# Altium PCB TL200 触摸板.PcbDoc
Units mm, origin at the board's own origin, x right, y up, seen from the top; angles counter-clockwise.
Board outline 50.45 x 47 mm, 2 copper layers (Top Layer, Bottom Layer); 13 components, 12 nets, 36 pads, 12 vias.
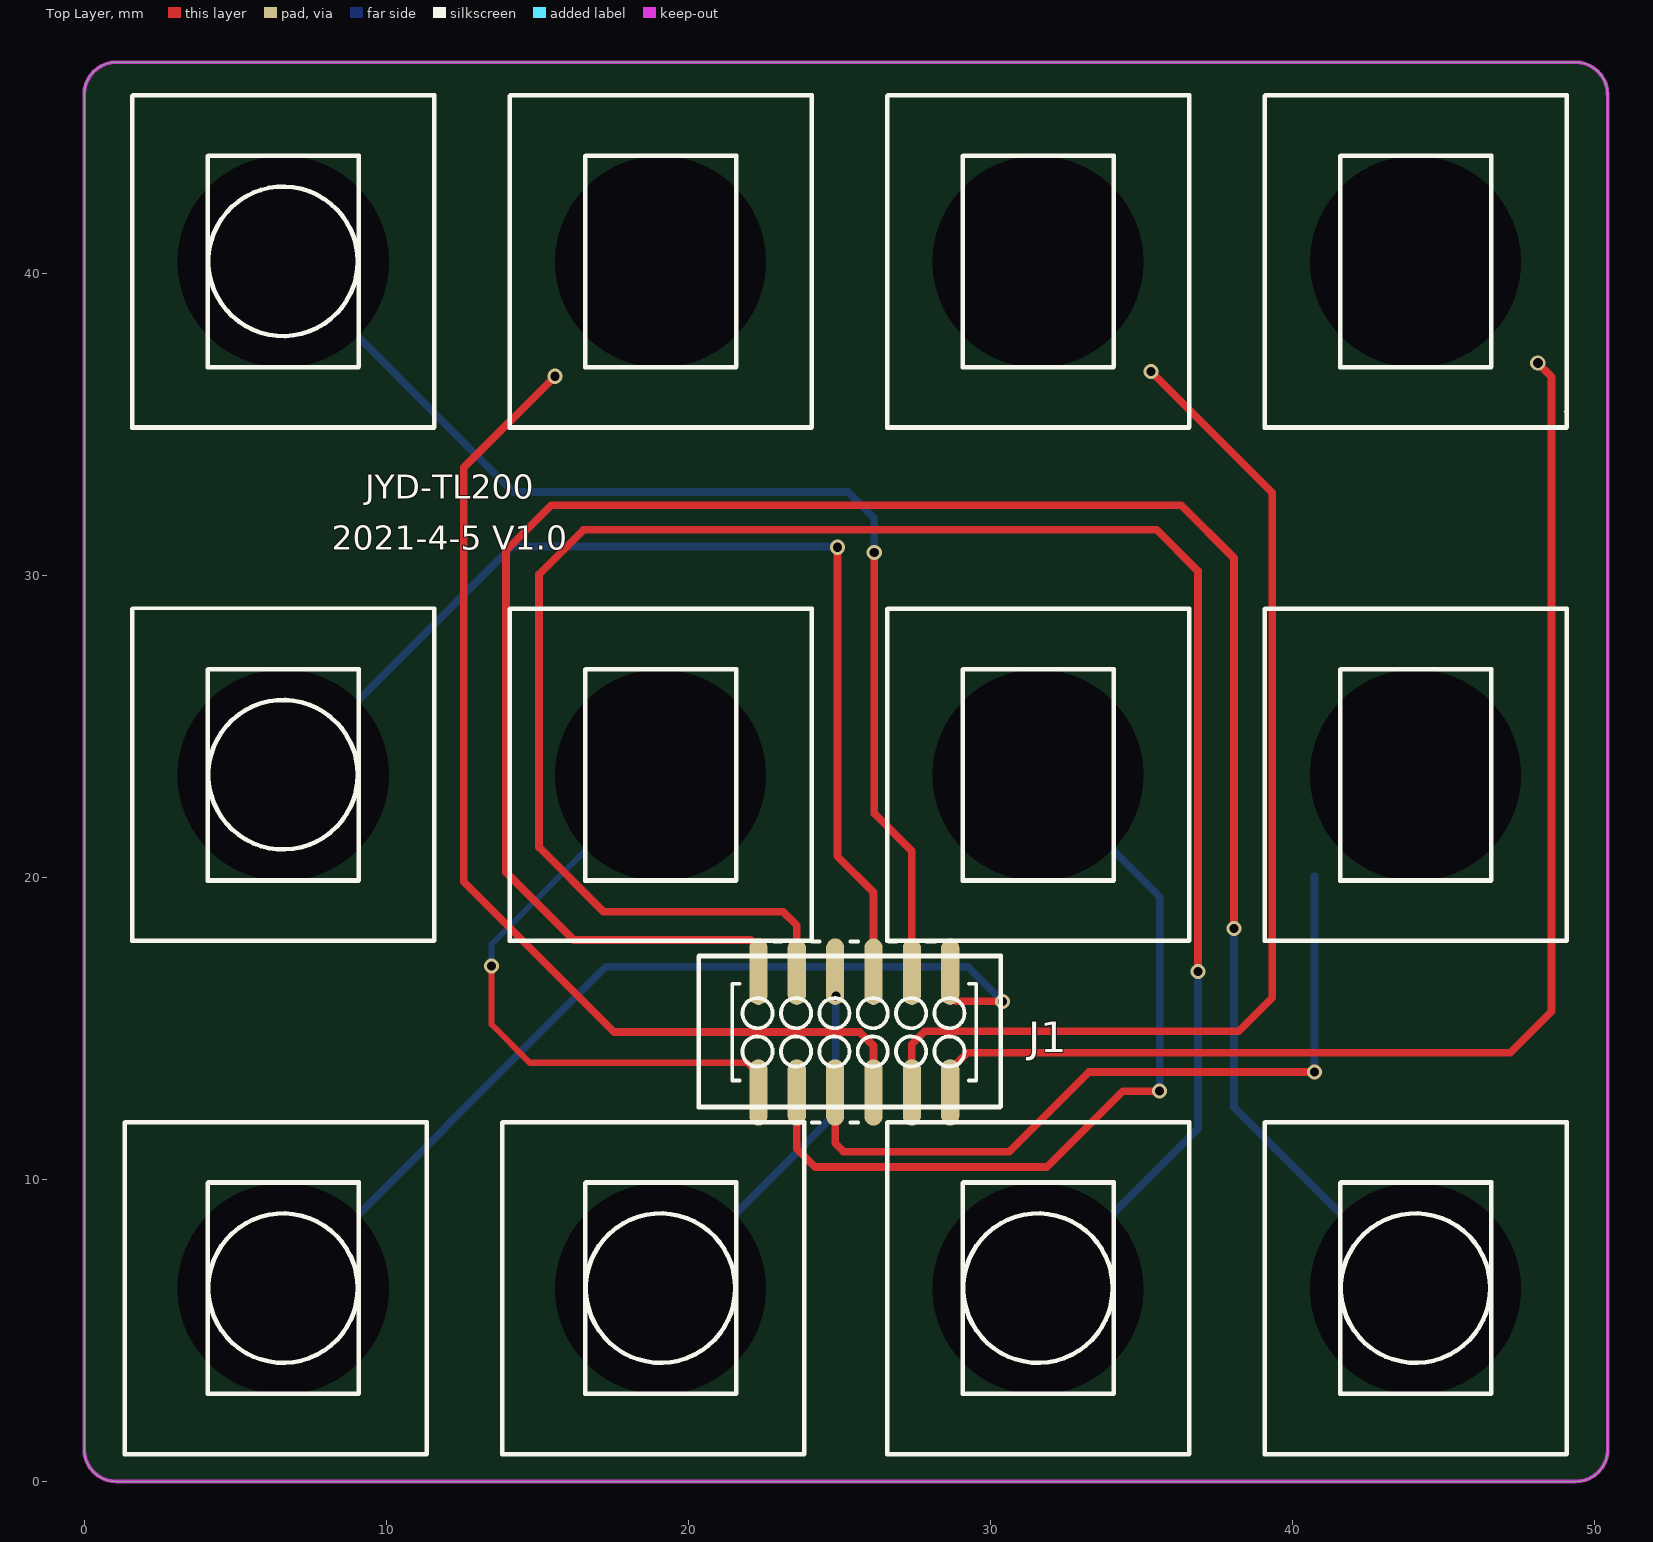
[diagram p0: Top Layer view]
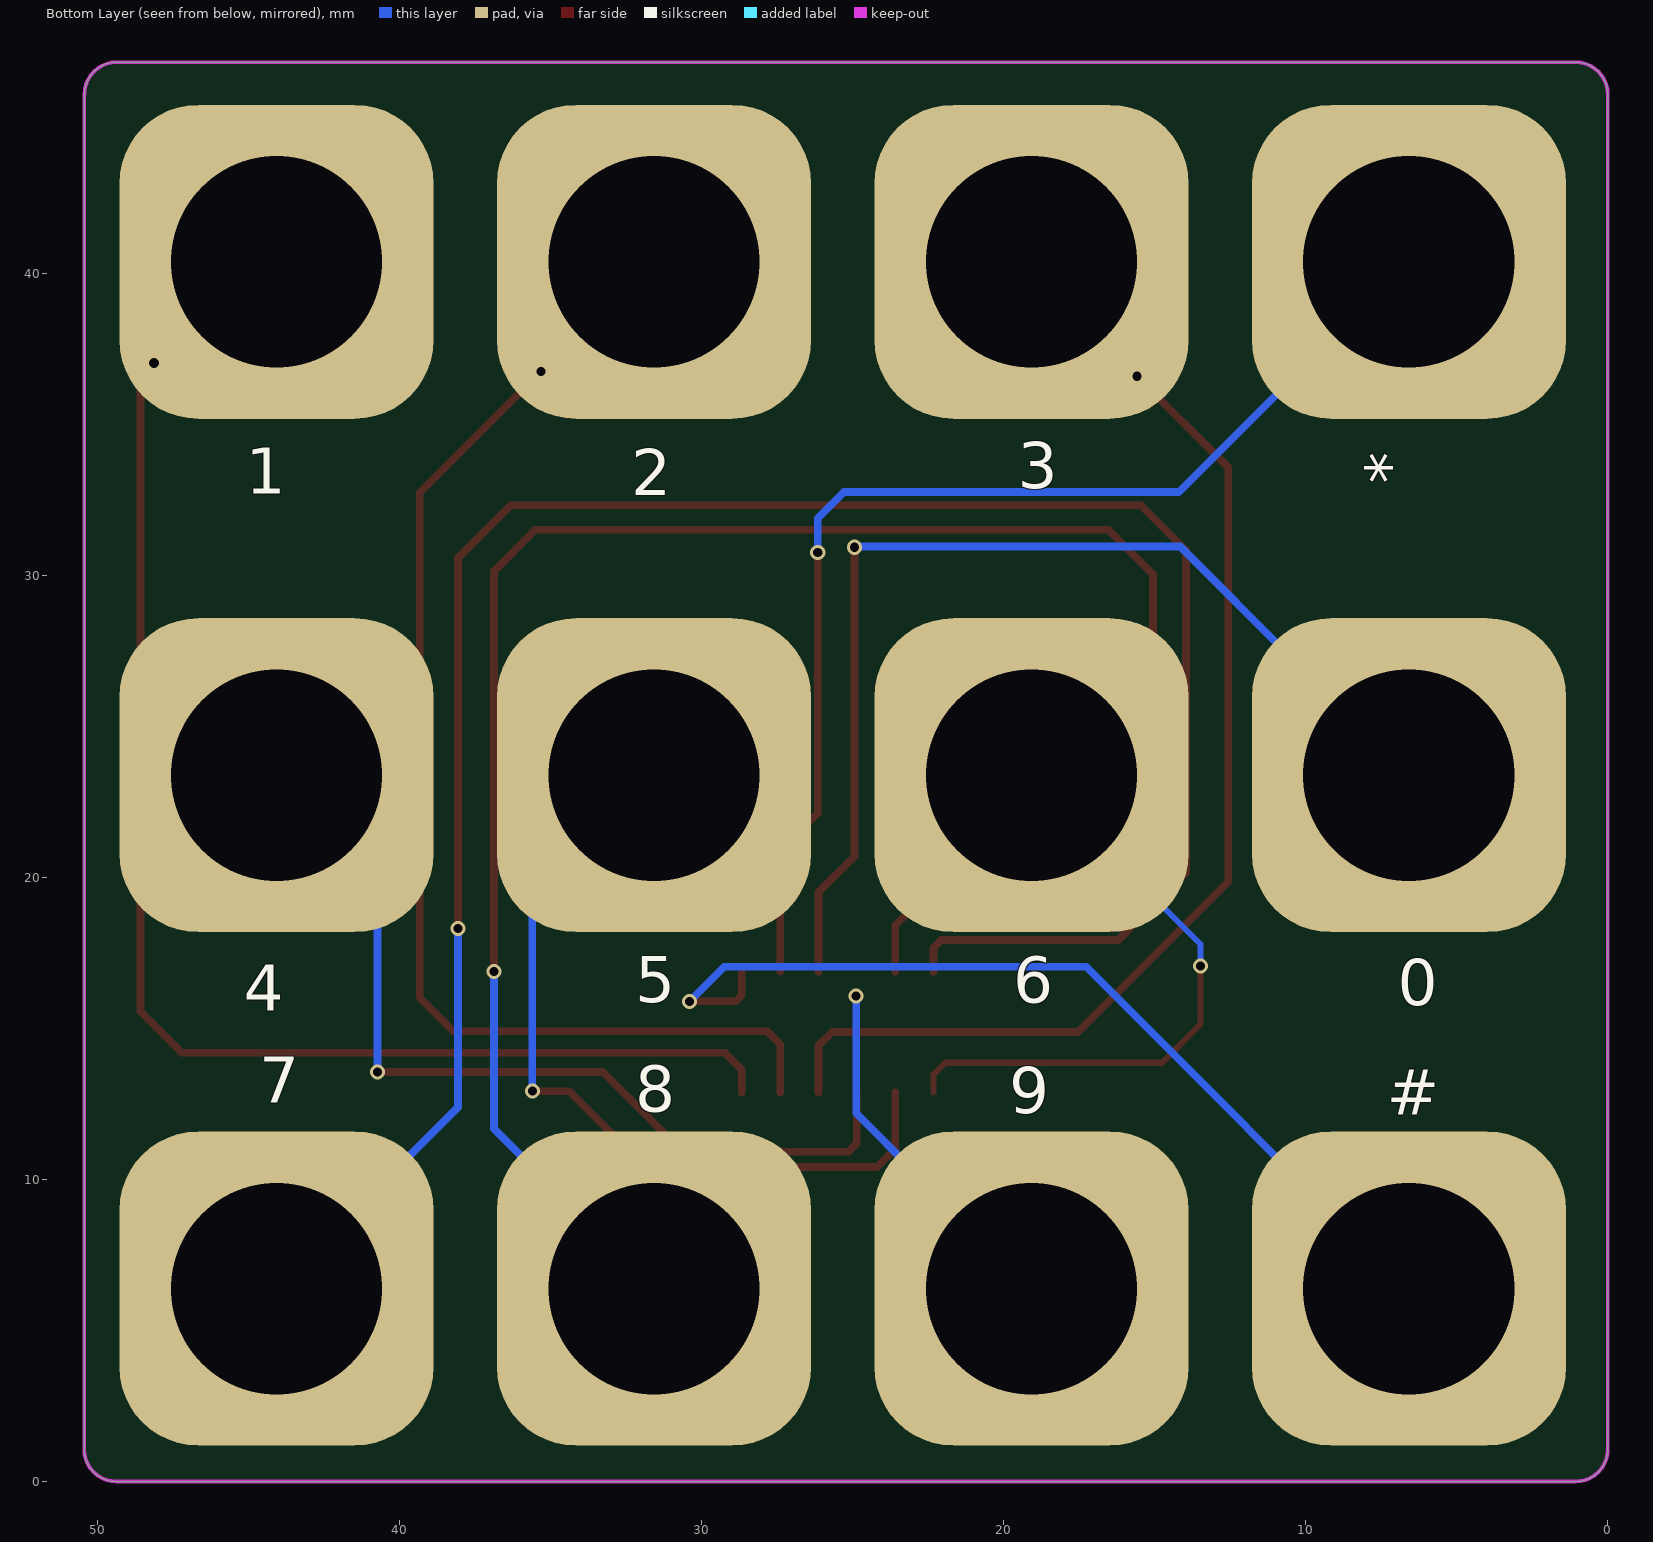
[diagram p1: Bottom Layer view, seen from below]

## Layer stack, top to bottom
Top Layer: signal copper 0.0356
Dielectric: dielectric 0.32, FR-4, Dk 4.8
Bottom Layer: signal copper 0.0356

## Board outline
0,1.067 0,45.933 cw(c1.067,45.933) 1.067,47 49.378,47 cw(c49.378,45.933) 50.444,45.933 50.452,45.926 50.452,1.067 cw(c49.385,1.067) 49.385,0 1.067,0 cw(c1.067,1.067)

## Design rules (kind name [scope] priority, off if disabled: settings)
Clearance [All] p1: gap=0.2
HoleSize [All] p1: absolutevalues=TRUE maxlimit=10 minlimit=0.025 maxpercent=80.000 minpercent=20.000
MinimumSolderMaskSliver [All] p1: minsoldermaskwidth=0
PolygonConnect [All] p1: connectstyle=Relief reliefconductorwidth=0.254 reliefentries=4 polygonreliefangle="90 Angle" airgapwidth=0.254
RoutingVias [All] p1: holewidth=0.3 width=0.5 viastyle="Through Hole" minholewidth=0.3 minwidth=0.5 maxholewidth=0.4 maxwidth=0.6
SilkToSolderMaskClearance SilkscreenOverComponentPads [IsPad] p1: minsilkscreentomaskgap=0 clearancetoexposedcopper=TRUE
SolderMaskExpansion [All] p1: expansion=0.102
Width [All] p1: maxlimit=1.016 minlimit=0.076 preferedwidth=0.254
25 further rules are at their usual default settings.

## Components (designator, comment, footprint, x,y, rotation, side; value= is the part's Value field where it differs from the comment)
0 "K" 焊盘1 6.585,23.39 r90 bottom
1 "K" 焊盘1 44.085,40.39 r90 bottom
2 "K" 焊盘1 31.585,40.39 r90 bottom
3 "K" 焊盘1 19.085,40.39 r90 bottom
4 "K" 焊盘1 44.085,23.39 r90 bottom
5 "K" 焊盘1 31.585,23.39 r90 bottom
6 "K" 焊盘1 19.085,23.39 r90 bottom
7 "K" 焊盘1 44.085,6.39 r90 bottom
8 "K" 焊盘1 31.585,6.39 r90 bottom
9 "K" 焊盘1 19.085,6.39 r90 bottom
# "K" 焊盘1 6.585,6.39 r90 bottom
* "K" 焊盘1 6.585,40.39 r90 bottom
J1 "Header 12H" SMT-6P*2*1.27MM 25.502,14.884 r180 top

## Footprints (in the part's own frame and the unit in brackets; to place one, negate y for a bottom-side part, rotate by r counter-clockwise, add the part's x,y. Pads: shape width x height; smd on the part's side, far side on the other; paste and mask are expansions set on the pad)
SMT-6P*2*1.27MM [mm]
  oval 0.6x2.2 smd paste+0: 1(-3.175,2) 2(-3.175,-2) 3(-1.905,2) 4(-1.905,-2) 5(-0.635,2) 6(-0.635,-2) 7(0.635,2) 8(0.635,-2) 9(1.905,2) 10(1.905,-2) 11(3.175,2) 12(3.175,-2)
  silkscreen extent -4.04,-3 4.04,3
焊盘1 [mm]
  rrect50% 10.4x10.4 / inner rrect50% 0x0 / far side rrect50% 0x0 hole 7 unplated: 1(0,0)
  round 1 smd: 1(3.81,3.81)

## Part data
0 1 2 3 4 5 6 7 8 9 # *: library part KEY-1
J1: "Header, 12-Pin, Right Angle"

## Via types
v1: diameter 0.5, hole 0.3, Top Layer to Bottom Layer, tented both sides, 11 vias
v2: diameter 0.5, hole 0.33, Top Layer to Bottom Layer, tented both sides, 1 vias

## Nets (pads, with @x,y where several pads share a name; then routed paths per layer and width w, separated by ;. In a path a pad name is that pad's centre, name@x,y a point inside that pad or via, vN(x,y) a via of type N, cw(c..) or ccw(c..) an arc to the next point about the centre after c; other vN are vias at no path point)
KEY0: 0.1 J1.6 | length 36.1
  Top Layer w0.254: v1(24.943,30.937) 24.943,20.701 26.137,19.507 J1.6
  Bottom Layer w0.254: 0.1@6.585,23.39 10.395,27.2 14.157,30.963 24.917,30.963 v1(24.943,30.937)
KEY1: 1.1 J1.1 | length 43.1
  Top Layer w0.254: J1.1 28.677,13.64 29.235,14.199 47.219,14.199 48.59,15.57 48.59,36.576 v2(48.133,37.033)
KEY2: 2.1 J1.3 | length 36.6
  Top Layer w0.254: J1.3 27.407,14.478 27.838,14.91 38.227,14.91 39.345,16.027 39.345,32.741 v1(35.331,36.754)
KEY3: 3.1 J1.5 | length 35.3
  Top Layer w0.254: v1(15.596,36.601) 12.573,33.579 12.573,19.863 17.551,14.884 25.679,14.884 26.137,14.427 J1.5
KEY4: 4.1 J1.7 | length 25.3
  Top Layer w0.254: J1.7 24.867,11.201 25.146,10.922 30.632,10.922 33.274,13.564 v1(40.742,13.564)
  Bottom Layer w0.254: v1(40.742,13.564) 4.1@40.742,20.047
KEY5: 5.1 J1.9 | length 27.3
  Top Layer w0.254: J1.9 23.597,11.024 24.206,10.414 31.877,10.414 34.392,12.929 v1(35.611,12.929)
  Bottom Layer w0.254: 5.1@31.585,23.39 35.611,19.365 v1(35.611,12.929)
KEY6: 6.1 J1.11 | length 20.7
  Top Layer w0.203: v1(13.487,17.069) 13.487,15.138 14.757,13.868 21.946,13.868 22.327,13.487 J1.11
  Bottom Layer w0.203: v1(13.487,17.069) 13.487,17.793 6.1@19.085,23.39
KEY7: 7.1 J1.12 | length 73
  Top Layer w0.254: J1.12 22.327,17.678 22.073,17.932 16.205,17.932 13.97,20.168 13.97,30.836 15.469,32.334 36.322,32.334 38.075,30.582 v1(38.075,18.313)
  Bottom Layer w0.254: v1(38.075,18.313) 38.075,12.401 7.1@44.085,6.39
KEY8: 8.1 J1.10 | length 69.1
  Top Layer w0.254: J1.10 23.597,18.415 23.139,18.872 17.196,18.872 15.062,21.006 15.062,30.048 16.535,31.521 35.509,31.521 36.881,30.15 v1(36.881,16.891)
  Bottom Layer w0.254: 8.1@31.585,6.39 35.395,10.2 36.881,11.686 v1(36.881,16.891)
KEY9: 9.1 J1.8 | length 12.1
  Bottom Layer w0.254: 9.1@19.085,6.39 22.895,10.2 24.892,12.197 v1(24.892,16.078)
KEY#: #.1 J1.2 | length 31.3
  Top Layer w0.254: J1.2 28.677,16.104 28.88,15.9 v1(30.404,15.9)
  Bottom Layer w0.254: #.1@6.585,6.39 6.619,6.39 17.272,17.043 29.261,17.043 v1(30.404,15.9)
KEY*: *.1 J1.4 | length 38.6
  Top Layer w0.254: v1(26.162,30.759) 26.162,22.123 27.407,20.879 J1.4
  Bottom Layer w0.254: *.1@6.585,40.39 14.209,32.766 25.298,32.766 26.162,31.902 v1(26.162,30.759)

## Keep-outs
Keep-Out Layer:
  lines w0.127: 50.444,45.933 ccw(c49.378,45.933) 49.378,47 1.067,47 ccw(c1.067,45.933) 0,45.933 0,1.067 ccw(c1.067,1.067) 1.067,0 49.385,0 ccw(c49.385,1.067) 50.452,1.067 50.452,45.926

## Silkscreen, mask and mechanical layers (free items; w line width, h text height)
Top Overlay:
  drawing of 218 lines, arcs and shapes, not listed
  text "JYD-TL200" at 9.312,32.541 h0.8
  text "2021-4-5 V1.0" at 8.2,30.858 h0.8